# Altium PCB L506_M_V1.1.1.PcbDoc
Units mil, origin at the board's own origin, x right, y up, seen from the top; angles counter-clockwise.
Board outline 5890 x 4596 mil, 2 copper layers (Top Layer, Bottom Layer); 95 components, 63 nets, 327 pads, 101 vias.
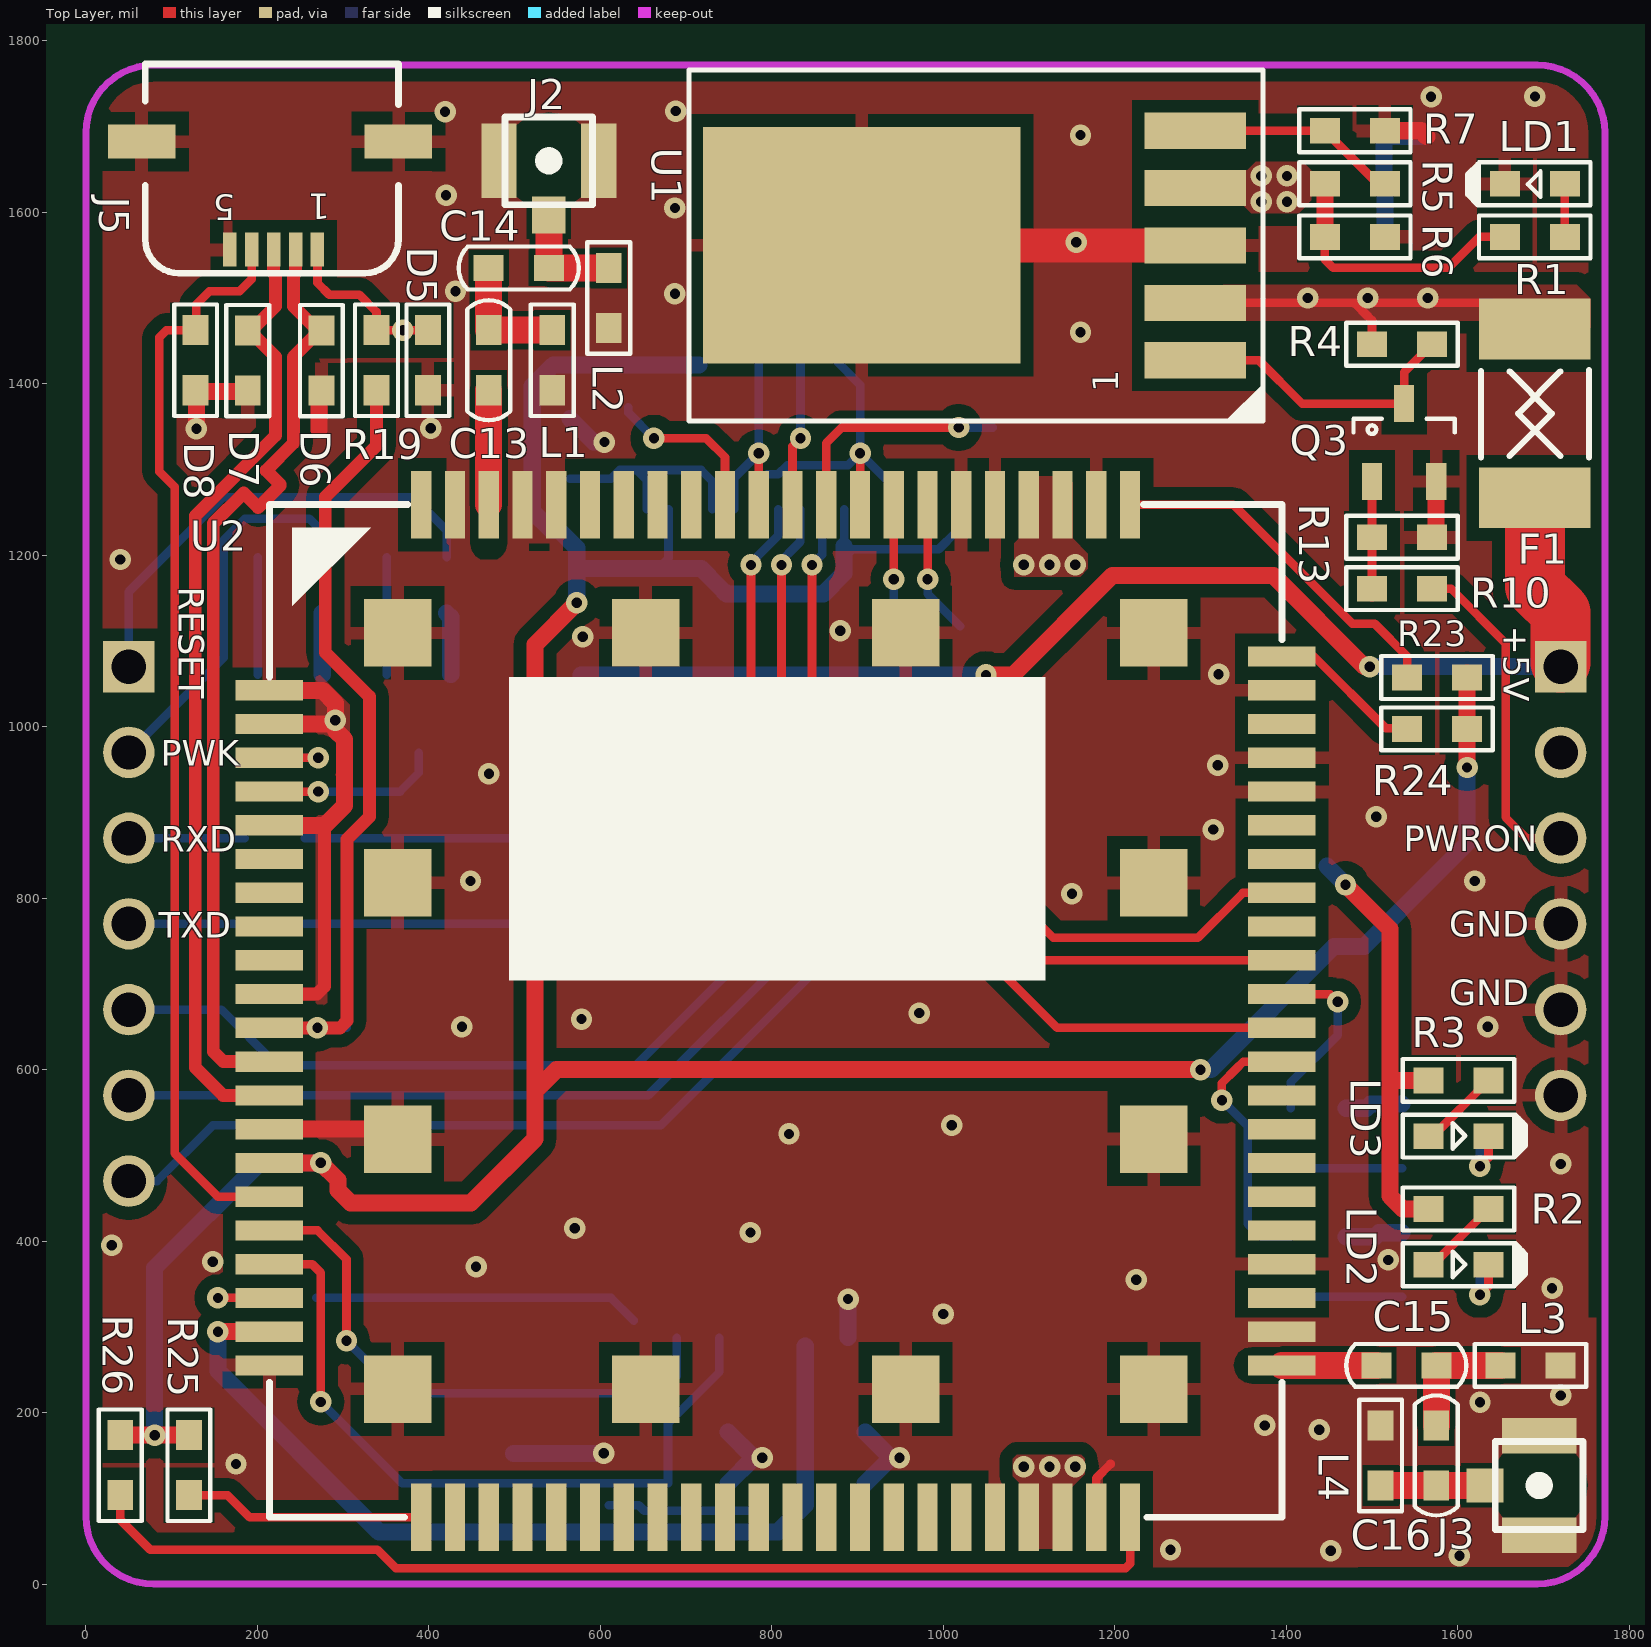
[diagram p0: Top Layer view]
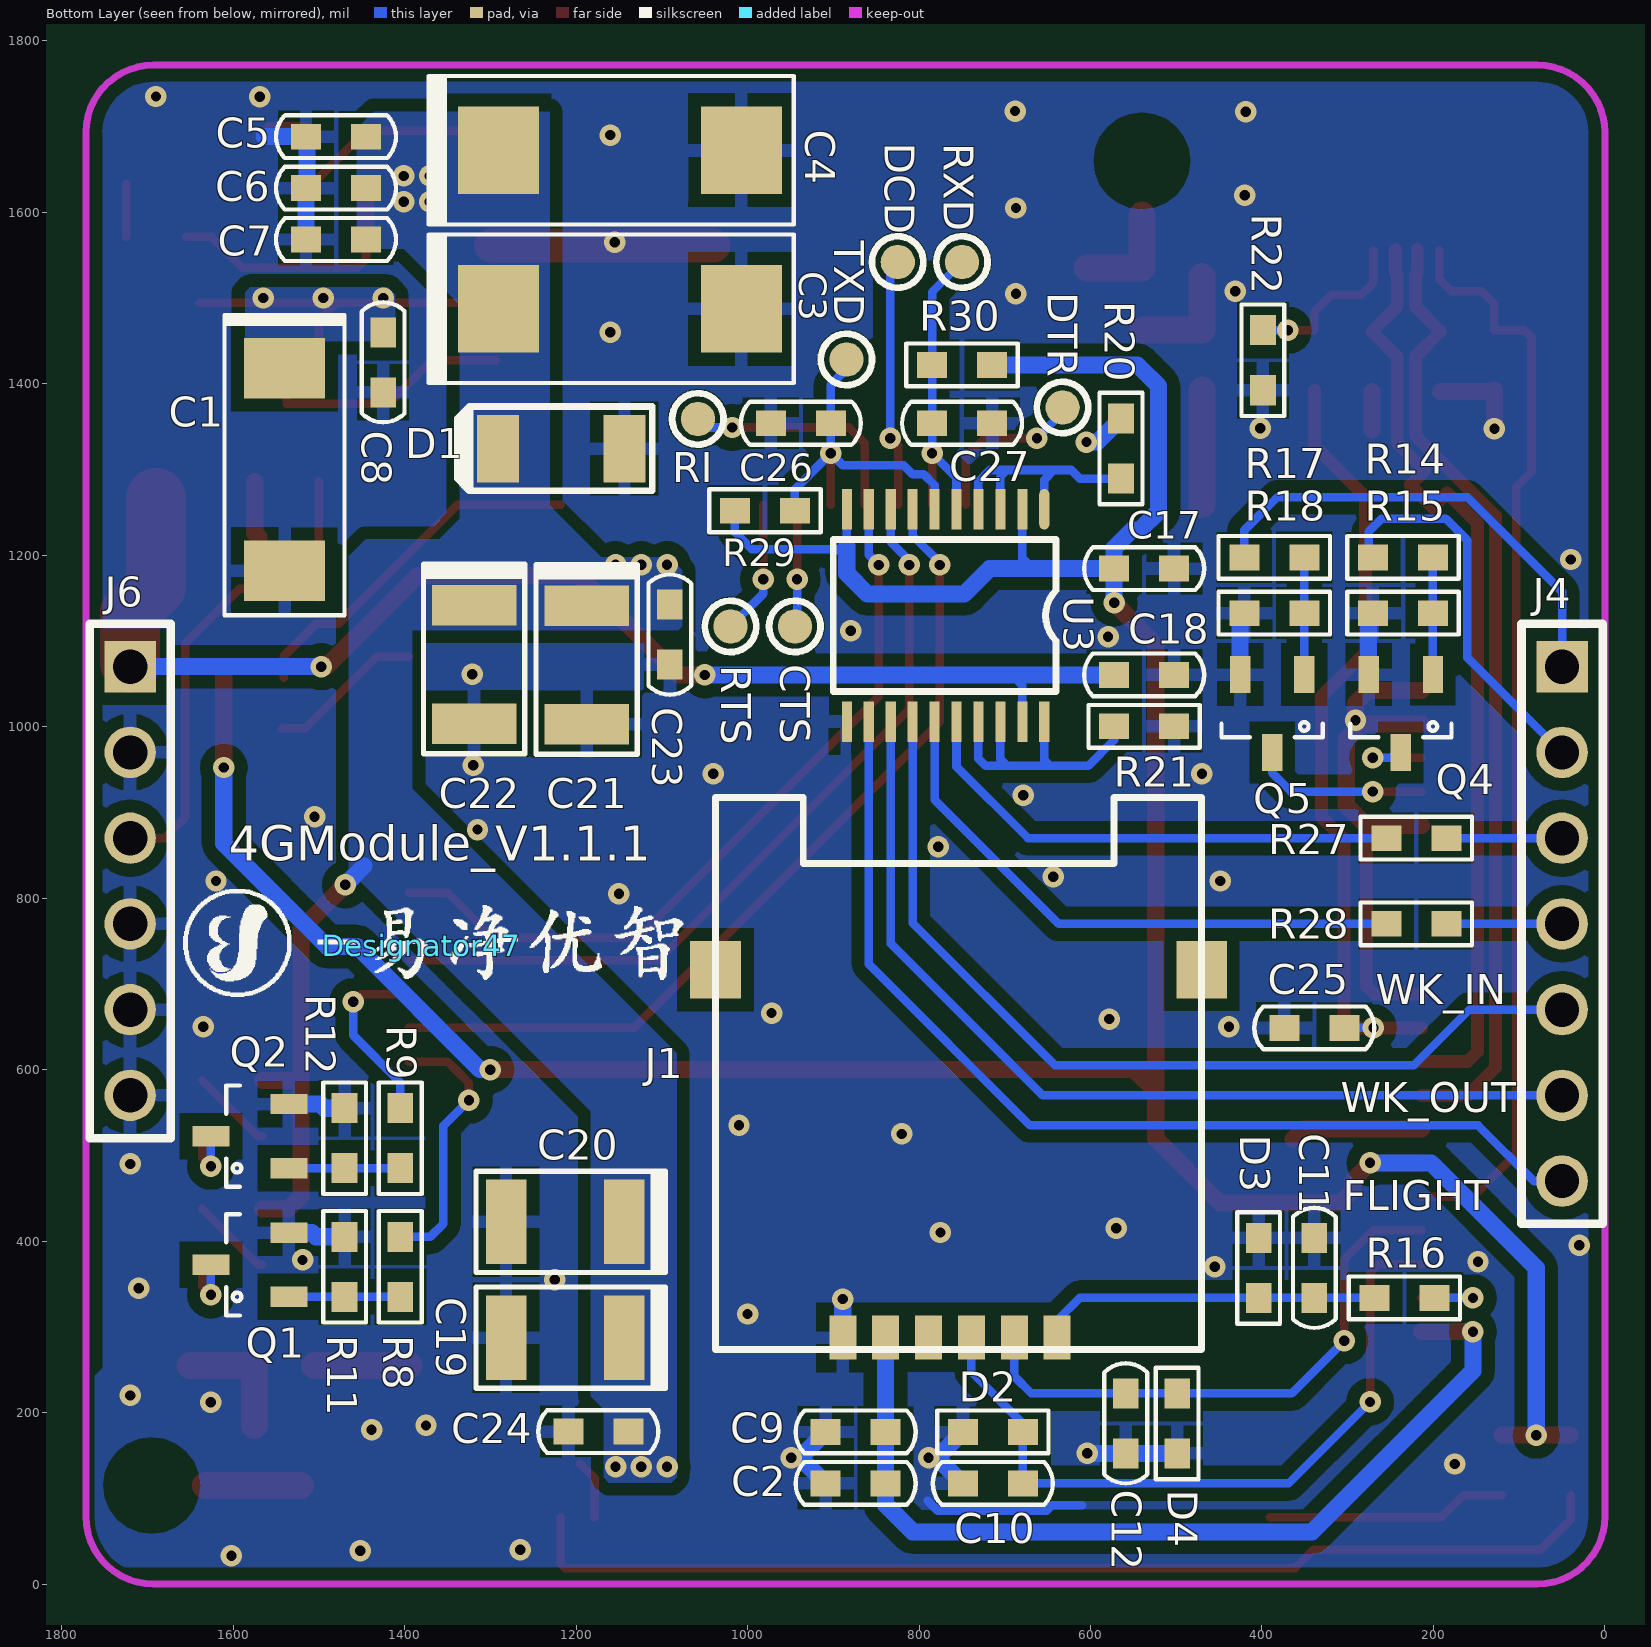
[diagram p1: Bottom Layer view, seen from below]

## Layer stack, top to bottom
Top Layer: signal copper 1.4
Dielectric: dielectric 12.6, FR-4, Dk 4.8
Bottom Layer: signal copper 1.4

## Board outline
-1744.1,2857.4 -1744.1,-1531.6 -1698.1,-1577.6 3891.9,-1577.6 3937.9,-1531.6 4145.9,-1323.6 4145.9,2672.4 3799.9,3018.4 -1490.1,3018.4

## Design rules (kind name [scope] priority, off if disabled: settings)
Clearance [All] p1: gap=6
ComponentClearance [All] p1: gap=5 collisioncheckmode=2 verticalgap=10
DiffPairsRouting DiffPair_DiffPairsRouting [InDifferentialPair ('NewDifferentialPair1')] p1: maxlimit=100 minlimit=6 mostfreqgap=6 maxuncoupledlength=500
DiffPairsRouting [All] p2: maxlimit=100 minlimit=6 mostfreqgap=6 maxuncoupledlength=500
MatchedLengths DiffPair_MatchedLengths [InDifferentialPair ('NewDifferentialPair1')] p1: tolerance=1000 checknetsindiffpair=TRUE checkdiffpairvsdiffpair=TRUE checkothers=TRUE
PlaneClearance [All] p1: clearance=5.91
PlaneConnect [All] p1: planeconnectstyle=Relief reliefexpansion=20 reliefentries=4 reliefconductorwidth=20 reliefairgap=10
PolygonConnect [All] p1: connectstyle=Relief reliefconductorwidth=15 reliefentries=4 polygonreliefangle="90 Angle"
RoutingCorners [All] p1: cornerstyle=Round minsetback=393.7 maxsetback=393.7
RoutingVias [All] p1: holewidth=28 width=50 viastyle="Through Hole" minholewidth=12 minwidth=25 maxholewidth=50 maxwidth=50
SolderMaskExpansion [All] p1: expansion=4
TestPointUsage [All] p1: valid=0 allowmultiple=FALSE
Testpoint [All] p1: side=15 testpointundercomponent=TRUE minsize=40 maxsize=100 preferedsize=60 minholesize=0 maxholesize=40 preferedholesize=32 testpointgrid=1 style=1021 order=0123456789
Width DiffPair_Width [InDifferentialPair('NewDifferentialPair1')] p1: maxlimit=15 minlimit=15 preferedwidth=15
Width [All] p2: maxlimit=200 minlimit=10 preferedwidth=15
14 further rules are at their usual default settings.

## Classes and differential pairs
differential pair NewDifferentialPair1: +4G_USB_P -4G_USB_N

## Components (designator, comment, footprint, x,y, rotation, side; value= is the part's Value field where it differs from the comment)
C1 "100uF/16V" C_TAN_C 1540,1300 r270 bottom
C2 "33PF" 0603_C 838.9,117.4 r0 bottom
C3 "220uF/10V" C_TAN_D 1148.9,1487.4 r180 bottom
C4 "220uF/10V" C_TAN_D 1148.9,1672.4 r180 bottom
C5 "0.1uF" 0603_C 1515,1688.19 r180 bottom
C6 "2.2μF" 0603_C 1515,1628.19 r180 bottom
C7 "33PF" 0603_C 1515,1568.19 r180 bottom
C8 "0.1uF" 0603_C 1425,1390 r90 bottom
C9 "1uF" 0603_C 838.9,177.4 r0 bottom
C10 "33PF" 0603_C 748.9,117.4 r180 bottom
C11 "33PF" 0603_C 338.9,403.74 r270 bottom
C12 "33PF" 0603_C 558.9,152.4 r90 bottom
C13 "27PF" 0603_C 469.8,1392.4 r90 top
C14 "27PF" 0603_C 469.8,1535 r0 top
C15 "27PF" 0603_C 1505,255 r0 top
C16 "27PF" 0603_C 1575,185 r270 top
C17 "0.1uF" 0603_C 502.41,1184.37 r0 bottom
C18 "0.1uF" 0603_C 502.41,1060.4 r0 bottom
C19 "47uF/10V" C_TAN_B 1143.9,287.4 r0 bottom
C20 "47uF/10V" C_TAN_B 1143.9,422.4 r0 bottom
C21 "47uF/10V" C_TAN_B 1187.64,1140.83 r270 bottom
C22 "47uF/10V" C_TAN_B 1318.9,1141.4 r270 bottom
C23 "1uF" 0603_C 1090.63,1072.4 r90 bottom
C24 "1uF" 0603_C 1209.09,177.83 r180 bottom
C25 "33PF" 0603_C 373.9,648.66 r180 bottom
C26 "1nF" 0603_C 972.87,1353.94 r180 bottom
C27 "1nF" 0603_C 714.76,1353.94 r0 bottom
CTS "Component_1" TP-40 944.76,1116.94 r0 bottom (schematic designator TP3)
D1 "BZV55C5V1" SOD-80 1217.41,1324.37 r0 bottom
D2 "EGA10603V05A1-B" 0603_R 748.9,177.4 r180 bottom
D3 "EGA10603V05A1-B" 0603_R 403.9,403.74 r270 bottom
D4 "EGA10603V05A1-B" 0603_R 498.9,152.4 r90 bottom
D5 "EGA10603V05A1-B" 0603_R 398.9,1392.4 r90 top
D6 "EGA10603V05A1-B" 0603_R 274.66,1391.91 r90 top
D7 "EGA10603V05A1-B" 0603_R 188.66,1391.91 r90 top
D8 "EGA10603V05A1-B" 0603_R 127.9,1392.4 r90 top
DCD "Component_1" TP-40 824.76,1541.94 r0 bottom (schematic designator TP5)
Designator47 "Comment" PIC_AIRFACTORY-1500 1380,745 r180 bottom
DTR "Component_1" TP-40 632.5,1372.28 r0 bottom (schematic designator TP4)
F1 "Fuse 2A" 1812_F 1690,1267 r90 top
J1 "SIM_Card" MicroSIM-6 888.9,287.4 r180 bottom
J2 "CON2" RF-Z 539.8,1660 r0 top
J3 "CON2" RF-Z 1695,115 r270 top
J4 "CON7" SIP7 50,1070 r270 bottom
J5 "USB" MICROUSB_SMD1 218.87,1662.94 r180 top
J6 "CON6" SIP6 1720,1070 r270 bottom
L1 "NC" 0603_R 543.9,1392.4 r90 top
L2 "NC" 0603_R 609.8,1465 r90 top
L3 "NC" 0603_R 1720,255 r180 top
L4 "NC" 0603_R 1510,185 r270 top
LD1 "WHITE" LED_0603 1724.88,1633.19 r180 top
LD2 "WHITE" LED_0603 1565.87,372.4 r0 top
LD3 "WHITE" LED_0603 1565.87,522.4 r0 top
Q1 "2N3904" SOT23 1535,335 r0 bottom
Q2 "2N3904" SOT23 1535,485 r0 bottom
Q3 "2N3904" SOT23 1500,1286 r90 top
Q4 "2N3904" SOT23 200.63,1060.67 r270 bottom
Q5 "2N3904" SOT23 350.63,1060.67 r270 bottom
R1 "1K" 0603_R 1654.88,1571.26 r0 top
R2 "1K" 0603_R 1565.87,437.4 r0 top
R3 "1K" 0603_R 1565.87,587.4 r0 top
R4 "47K" 0603_R 1500,1446 r0 top
R5 "100K" 0603_R 1515,1633.19 r180 top
R6 "750R" 0603_R 1515,1571.26 r180 top
R7 "47K" 0603_R 1445,1695 r0 top
R8 "4.7K" 0603_R 1405,405 r270 bottom
R9 "4.7K" 0603_R 1405,555 r270 bottom
R10 "4.7K" 0603_R 1570,1161 r180 top
R11 "47K" 0603_R 1470,335 r90 bottom
R12 "47K" 0603_R 1470,485 r90 bottom
R13 "47K" 0603_R 1500,1221 r0 top
R14 "4.7K" 0603_R 270.63,1197.4 r180 bottom
R15 "47K" 0603_R 200.63,1132.4 r0 bottom
R16 "22R" 0603_R 268.9,333.74 r180 bottom
R17 "4.7K" 0603_R 420.63,1197.4 r180 bottom
R18 "47K" 0603_R 350.63,1132.4 r0 bottom
R19 "0R" 0603_R 338.9,1392.4 r90 top
R20 "47K" 0603_R 564.41,1289.4 r90 bottom
R21 "47K" 0603_R 502.41,1000.4 r0 bottom
R22 "47K" 0603_R 398.9,1462.4 r270 bottom
R23 "NC" 0603_R 1610.87,1057.4 r180 top
R24 "NC" 0603_R 1610.87,997.4 r180 top
R25 "NC" 0603_R 120.08,173.66 r270 top
R26 "NC" 0603_R 40.08,173.66 r270 top
R27 "22R" 0603_R 185,870 r0 bottom
R28 "22R" 0603_R 185,770 r0 bottom
R29 "10K" 0603_R 944.76,1251.94 r0 bottom
R30 "10K" 0603_R 784.76,1421.94 r180 bottom
RI "Component_1" TP-40 1057.87,1358.94 r0 bottom (schematic designator TP2)
RTS "Component_1" TP-40 1019.76,1116.94 r0 bottom (schematic designator TP7)
RXD "Component_1" TP-40 749.76,1541.94 r0 bottom (schematic designator TP1)
TXD "Component_1" TP-40 884.5,1428.28 r0 bottom (schematic designator TP6)
U1 "MIC29302" TO-263-5 1293.9,1427.4 r90 top
U2 "L506" L506 213.9,1042.4 r0 top locked
U3 "TXB0108RWR" TSSP20 653.9,1253.66 r270 bottom

## Footprints (in the part's own frame and the unit in brackets; to place one, negate y for a bottom-side part, rotate by r counter-clockwise, add the part's x,y. Pads: shape width x height; smd on the part's side, far side on the other; paste and mask are expansions set on the pad)
0603_C [mil]
  rect 35x30 smd: 1(0,0) 2(70,0)
  silkscreen extent -35,-25 105,25, body extent 5,-15 65,15, height 39
0603_R [mil]
  rect 35x30 smd: 1(0,0) 2(70,0)
  silkscreen extent -30,-25 100,25, body extent 5,-15 65,15, height 39
1812_F [mm]
  rect 1.8x3.3 smd: 1(0,0) 2(5,0)
  silkscreen extent 1.2,-1.6 3.78,1.6
C_TAN_B [mm]
  rect 1.2x2.5 smd: 1(0,0) 2(3.5,0)
  silkscreen extent -1.22,-1.5 4.39,1.5, body extent 0,-1.5 3.5,1.5, height 2
C_TAN_C [mm]
  rect 1.8x2.4 smd: 1(-3,0) 2(3,0)
  silkscreen extent -4.57,-1.78 4.32,1.78, body extent -3,-1.78 3,1.78, height 2.6
C_TAN_D [mm]
  rect 2.4x2.6 smd: 1(-3.6,0) 2(3.6,0)
  silkscreen extent -5.67,-2.2 5.15,2.2, body extent -3.67,-2.2 3.53,2.2, height 4.3
L506 [mm]
  rect 2x0.6 smd: 1(0,0) 2(0,-1) 3(0,-2) 4(0,-3) 5(0,-4) 6(0,-5) 7(0,-6) 8(0,-7) 9(0,-8) 10(0,-9) 11(0,-10) 12(0,-11) 13(0,-12) 14(0,-13) 15(0,-14) 16(0,-15) 17(0,-16) 18(0,-17) 19(0,-18) 20(0,-19) 41(30,-19) 42(30,-18) 43(30,-17) 44(30,-16) 45(30,-15) 46(30,-14) 47(30,-13) 48(30,-12) 49(30,-11) 50(30,-10) 51(30,-9) 52(30,-8) 53(30,-7) 54(30,-6) 55(30,-5) 56(30,-4) 57(30,-3) 58(30,-2) 59(30,-1) 60(30,0) 81(0,-20) 82(30,-20) 85(30,1)
  rect 0.6x2 smd: 21(5.5,-24.5) 22(6.5,-24.5) 23(7.5,-24.5) 24(8.5,-24.5) 25(9.5,-24.5) 26(10.5,-24.5) 27(11.5,-24.5) 28(12.5,-24.5) 29(13.5,-24.5) 30(14.5,-24.5) 31(15.5,-24.5) 32(16.5,-24.5) 33(17.5,-24.5) 34(18.5,-24.5) 35(19.5,-24.5) 36(20.5,-24.5) 37(21.5,-24.5) 38(22.5,-24.5) 39(23.5,-24.5) 40(24.5,-24.5) 61(24.5,5.5) 62(23.5,5.5) 63(22.5,5.5) 64(21.5,5.5) 65(20.5,5.5) 66(19.5,5.5) 67(18.5,5.5) 68(17.5,5.5) 69(16.5,5.5) 70(15.5,5.5) 71(14.5,5.5) 72(13.5,5.5) 73(12.5,5.5) 74(11.5,5.5) 75(10.5,5.5) 76(9.5,5.5) 77(8.5,5.5) 78(7.5,5.5) 79(6.5,5.5) 80(5.5,5.5) 83(25.5,-24.5) 84(4.5,-24.5) 86(4.5,5.5) 87(25.5,5.5)
  rect 2x2 smd: 88(3.8,1.7) 89(3.8,-5.7) 90(3.8,-13.3) 91(3.8,-20.7) 92(11.15,-20.7) 93(18.85,-20.7) 94(26.2,-20.7) 95(26.2,-13.3) 96(26.2,-5.7) 97(26.2,1.7) 98(18.85,1.7) 99(11.15,1.7)
  silkscreen extent 0,-24.5 30,5.5, body extent 0,-24.49 30,5.49, height 2.8
LED_0603 [mil]
  rect 35x30 smd: A(0,0) K(70,0)
  silkscreen extent -30,-25 114,25
MicroSIM-6 [mm]
  rect 1.5x1.7 smd: 0(-3.77,10.9) 0(10.63,10.9)
  rect 0.8x1.3 smd: 1(1.27,0) 2(3.81,0) 3(6.35,0) 5(0,0) 6(2.54,0) 7(5.08,0)
  silkscreen extent -3.77,-0.35 10.63,16
MICROUSB_SMD1 [mm]
  rect 0.4x1 smd: 1(-1.299,2.705) 2(-0.649,2.705) 3(0.001,2.705) 4(0.651,2.705) 5(1.301,2.705)
  rect 2x1 smd: 6(-3.699,-0.495) 7(3.901,-0.495)
  silkscreen extent -3.7,-2.8 3.8,3.4
PIC_AIRFACTORY-1500 [mil]
  silkscreen extent -278,-60 305,65
RF-Z [mm]
  rect 1x1.1 smd: 1(0,-1.6)
  rect 1.05x2.2 smd: 2(-1.475,0) 2(1.475,0)
  silkscreen extent -1.3,-1.3 1.3,1.3
SIP6 [mil]
  rect 60x60 hole 40: 1(0,0)
  round 60 hole 40: 2(100,0) 3(200,0) 4(300,0) 5(400,0) 6(500,0)
  silkscreen extent -50,-47 550,47
SIP7 [mil]
  rect 60x60 hole 40: 1(0,0)
  round 60 hole 40: 2(100,0) 3(200,0) 4(300,0) 5(400,0) 6(500,0) 7(600,0)
  silkscreen extent -50,-47 650,47
SOD-80 [mm]
  rect 1.25x2 smd: 1(-1.875,0) 2(1.875,0)
  silkscreen extent -2.7,-1.25 3.08,1.25
SOT23 [mm]
  rect 1.092x0.6 smd: 1(0,0) 2(0,-1.9) 3(2.308,-0.95)
  silkscreen extent 1.41,-2.45 1.85,0.55, body extent 0.45,-2.45 1.85,0.55, height 1.1
TO-263-5 [mm]
  rect 1.07x3 smd: 1(0,0) 2(1.7,0) 3(3.4,0) 4(5.1,0) 5(6.8,0)
  rect 7x9.4 smd: 6(3.41,9.878)
  silkscreen extent -1.8,-2 8.6,15, body extent 0,0 6.8,12.6, height 4.5
TP-40 [mil]
  round 40 smd: 1(0,0)
  silkscreen extent -30,-30 30,30
TSSP20 [mm]
  oval 1.2x0.3 smd: 1(0,0)
  rect 1.2x0.3 smd: 2(0,-0.65) 3(0,-1.3) 4(0,-1.95) 5(0,-2.6) 6(0,-3.25) 7(0,-3.9) 8(0,-4.55) 9(0,-5.2) 10(0,-5.85) 11(6.3,-5.85) 12(6.3,-5.2) 13(6.3,-4.55) 14(6.3,-3.9) 15(6.3,-3.25) 16(6.3,-2.6) 17(6.3,-1.95) 18(6.3,-1.3) 19(6.3,-0.65) 20(6.3,0)
  silkscreen extent 0.9,-6.25 5.4,0.35

## Part data
C1 C3 C4 C19 C20 C21 C22: library part ECAP, "E-CAP"
C2 C9 C10 C11 C12 C13 C14 C15 C16 C25: library part CAP, "CAP"
C5 C6 C7 C8 C17 C18 C23 C24 C26 C27: library part "Cap Semi", "Capacitor"
D1: library part "DIODE SCHOTTKY"
D2 D3 D4 D5 D6 D7 D8: library part "DIODE TVS BI-DIR"
F1: library part "Fuse 1", "Fuse"
J4: library part CON8
J5: library part USB-M
J6: library part CON7
L1 L2 L3 L4: library part L
LD1 LD2 LD3: library part LED, "LED"
Q1 Q2 Q3 Q4 Q5: library part NPN
R1 R2 R3 R6 R8 R9 R10 R11 R12 R13 R14 R15 R17 R18 R19 R20 R21 R22 R23 R24 R25 R26 R27 R28 R29 R30: library part RES1
R4 R5 R7 R16: library part R0.25W, "RESISTOR"
U3: library part TXB0108RGYR

## Via types
v1: diameter 25, hole 12, Top Layer to Bottom Layer, tented both sides, 101 vias

## Nets (pads, with @x,y where several pads share a name; then routed paths per layer and width w, separated by ;. In a path a pad name is that pad's centre, name@x,y a point inside that pad or via, vN(x,y) a via of type N, cw(c..) or ccw(c..) an arc to the next point about the centre after c; other vN are vias at no path point)
4G_FLIGHTMODE: U2.54 U3.9 | length 909.8
  Top Layer w10: v1(846.85,1188.66) 846.85,1035.33 1128.52,753.66 1296.85,753.66 1349.37,806.18 U2.54
  Bottom Layer w10: v1(846.85,1188.66) 858.62,1200.43 U3.9
4G_MAIN_ANT: C15.1 U2.82 | length 110
  Top Layer w31.5: U2.82 C15.1
4G_NETLIGHT: R9.1 U2.51 | length 215.6
  Top Layer w10: U2.51 1451,688.07 v1(1460,679.07)
  Bottom Layer w10: R9.1 1405,585 1460,640 v1(1460,679.07)
4G_STATUS: R8.1 U2.49 | length 316.9
  Top Layer w10: v1(1325,564.33) 1325,584.33 1341.03,600.36 1350,609.33 U2.49
  Bottom Layer w10: v1(1325,564.33) 1355,534.33 1355,420 1370,405 R8.1 ; v1@1325,569.33 v1@1327.5,566.83
4G_UART_CTS: CTS.1 U2.67 | length 146.6
  Top Layer w10: v1(942.24,1171.94) U2.67
  Bottom Layer w10: v1@942.24,1169.46 v1@944.76,1166.94 ; v1(942.24,1171.94) 942.24,1119.46 CTS.1
4G_UART_DCD: DCD.1 U2.70 | length 290.4
  Top Layer w10: U2.70 824.13,1327.13 v1(833.41,1336.4)
  Bottom Layer w10: DCD.1 833.41,1533.29 v1(833.41,1336.4)
4G_UART_DTR: DTR.1 U2.72 | length 195.8
  Top Layer w10: v1(662.5,1336.28) 723.5,1336.28 745.39,1314.39 U2.72
  Bottom Layer w10: DTR.1 632.5,1366.28 v1(662.5,1336.28)
4G_UART_RI: RI.1 U2.69 | length 268.8
  Top Layer w10: U2.69 863.5,1330.83 881.61,1348.94 v1@1012.87,1348.94
  Bottom Layer w10: v1(1017.87,1348.94) RI.1@1057.87,1348.94
4G_UART_RTS: RTS.1 U2.66 | length 157.8
  Top Layer w10: v1(981.61,1171.94) U2.66
  Bottom Layer w10: v1(981.61,1171.94) 981.61,1155.09 RTS.1
4G_UART_RXD: C27.2 R30.1 RXD.1 U2.71 U3.5 | length 374.6
  Top Layer w10: U2.71 v1(784.76,1318.94)
  Bottom Layer w10: RXD.1 784.76,1506.94 v1(784.76,1318.94) 756.26,1290.43 U3.5
4G_UART_TXD: C26.2 R29.1 TXD.1 U2.68 U3.6 | length 430.4
  Top Layer w10: U2.68 v1(902.87,1318.94)
  Bottom Layer w10: U3.6 781.85,1281.84 794.41,1294.4 807.5,1294.4 818.09,1305 888.94,1305 v1(902.87,1318.94) ; TXD.1@873.5,1428.28 902.87,1398.91 v1(902.87,1318.94) ; R29.1 944.76,1277.05 v1(902.87,1318.94)
4G_USB_ID: D8.2 J5.4 U2.16 | length 1277.9
  Top Layer w10: J5.4@193.28,1555.91 193.28,1522.02 179.09,1507.83 144.09,1507.83 128.9,1492.64 128.9,1462.4 93.9,1462.4 85.63,1454.13 85.63,1297.4 103.5,1279.53 103.5,502.25 153.9,451.85 U2.16
4G_USB_N: D6.2 J5.2 U2.12 | length 1117.3
  Top Layer w15: U2.12 160.17,609.33 148.5,621 148.5,1237.15 183.98,1272.63 200.88,1255.72 226.59,1281.44 226.59,1282.44 210.19,1298.84 242.13,1330.78 242.13,1431.38 271.66,1460.91 242.13,1490.44 242.13,1526.68 244.43,1528.98 J5.2
4G_USB_P: D7.2 J5.3 U2.13 | length 1118
  Top Layer w15: U2.13 160.04,569.96 127.5,602.5 127.5,1245.85 221.13,1339.48 221.13,1431.45 191.66,1460.91 221.13,1490.38 221.13,1526.68 218.83,1528.98 J5.3
4G_USB_VBUS: C25.2 R19.1 U2.11 | length 920.4
  Top Layer w15: U2.11 296.2,648.7 304.51,657.01 304.51,868.78 317.66,881.92 330.73,895 330.73,1035 279.09,1086.64 279.09,1267.83 338.9,1327.64 R19.1
  Bottom Layer w10: v1(269.96,648.7) C25.2
4G_WAKEUP_IN: U2.50 U3.7 | length 1025.6
  Top Layer w10: v1(775.67,1188.66) 775.67,1005.84 1132.81,648.7 U2.50
  Bottom Layer w10: v1@775.67,1191.26 807.44,1223.03 U3.7
4G_WAKEUP_OUT: U2.52 U3.8 | length 942.1
  Top Layer w10: v1(811.26,1188.66) 811.26,1020.58 1104.4,727.44 U2.52
  Bottom Layer w10: v1@811.26,1193.85 826.12,1208.71 833.03,1215.62 U3.8
+3.8V: C3.1 C4.1 C5.2 C6.2 C7.2 C19.1 C20.1 C21.1 C22.1 C23.2 C24.2 D1.2 R1.1 R2.1 R3.1 R5.2 R6.2 U1.4 U2.38 U2.39 U2.62 U2.63 | length 813.8
  Top Layer w10: R6.2@1445,1561.26 1445,1545 1454.88,1535.12 1589,1535.12 1625.14,1571.26 R1.1
  Top Layer w20: R6.2 R5.2@1445,1628.19 ; v1(1469.08,815.66) 1520.87,763.87 1520.87,452.4 1535.87,437.4 R2.1 ; 1520.87,587.4 R3.1
  Bottom Layer w20: 1447.34,837.4 v1(1469.08,815.66)
  other v1: 1093.9,136.85 1123.9,136.85 1153.9,136.85 1093.9,1188.94 1123.9,1188.94 1153.9,1188.94 1370.87,1612.4 1400.87,1612.4 1370.87,1642.4 1400.87,1642.4
+5V: C18.2 F1.1 J6.1 U3.19 | length 1487.8
  Top Layer w20: v1(1049.76,1060.4) 1081.23,1060.4 1197.34,1176.52 1384.75,1176.52 1491.27,1070 v1(1497.27,1070)
  Top Layer w70: F1.1 1690,1163.27 1720,1133.27 J6.1@1720,1075
  Bottom Layer w10: U3.19 679.49,1048.02 683.87,1052.4
  Bottom Layer w20: C18.2@577.41,1060.4 v1(1049.76,1060.4) ; v1(1497.27,1070) J6.1
BOOT_CFG0: R24.2 U2.85 | length 184.3
  Top Layer w10: U2.85 1432.5,1081.77 1516,998.27 1540.87,998.27 1541.73,998.27 1542.6,997.4 R24.2
BOOT_CFG1: R23.2 U2.87 | length 421.1
  Top Layer w10: U2.87 1338.33,1258.94 1477.27,1120 1503.13,1120 1540.87,1082.26 R23.2
COEX1: R26.2 U2.83 | length 1286
  Top Layer w10: R26.2 40.08,74.92 75,40 340,40 361.34,18.66 1212.83,18.66 1217.83,23.66 U2.83
COEX2: R25.2 U2.84 | length 281.7
  Top Layer w10: R25.2 165.08,103.66 190.91,77.83 U2.84
FLIGHTMODE: J4.7 U3.12 | length 1195.9
  Bottom Layer w10: J4.7 83,470 148,535 670.4,535 858.62,723.22 U3.12
GND: C1.2 C2.2 C3.2 C4.2 C5.1 C6.1 C7.1 C8.1 C9.2 C10.1 C11.1 C12.1 C17.1 C18.1 C19.2 C20.2 C21.2 C22.2 C23.1 C24.1 C25.1 C26.1 C27.1 D1.1 D2.1 D3.1 D4.1 D5.1 D6.1 D7.1 D8.1 J1.5 J2.2 J3.2 J5.5 J5.6 J5.7 J6.2 J6.4 J6.5 J6.6 L1.1 L2.1 L3.1 L4.1 LD1.K Q1.2 Q2.2 Q3.2 Q4.2 Q5.2 R6.1 R7.2 R11.2 R12.2 R13.2 R15.2 R18.2 R20.2 R21.1 R22.2 U1.3 U1.6 U2.1 U2.2 U2.5 U2.10 U2.14 U2.37 U2.40 U2.41 U2.43 U2.57 U2.58 U2.60 U2.61 U2.64 U2.65 U2.77 U2.78 U2.80 U2.81 U2.88 U2.89 U2.90 U2.91 U2.92 U2.93 U2.94 U2.95 U2.96 U2.97 U2.98 U2.99 U3.11 | length 2411.6
  Top Layer w10: U2.40 1178.46,123.46 1195,140
  Top Layer w15: U2.10 269.17,688.07 278.09,697 278.09,885.36
  Top Layer w20: v1(128.9,1347.4) 128.9,1392.4 130.39,1390.91 D7.1@191.66,1390.91 ; U2.14 351.69,530.59 U2.90 ; U2.5 278.65,884.92 ; U2.2 286.5,1003.03 v1(290.87,1007.4) ; U2.1 275.87,1042.4 290.87,1027.4 290.87,995.87 301.73,985 301.73,908 286.1,892.37 279.09,885.36 ; 271.66,1345.91 D6.1@271.66,1390.91 ; R7.2 1557.09,1695 1563.9,1688.19 ; R13.2 1574.8,1225.8 Q3.2
  Top Layer w40: U1.6@1039.72,1561.26 U1.3 U1.3@1298.9,1561.26
  Bottom Layer w10: 609.76,91.94 644.76,91.94 651.3,85.4 778.23,85.4 789.76,96.94
  Bottom Layer w20: Q4.2 275.63,1060.87 R15.2@275.63,1132.4 ; R18.2 425.43,1127.6 Q5.2 ; D4.1 C12.1 v1(603.9,152.4) ; R20.2 591.87,1331.94 v1(604.76,1331.94) ; C10.1 v1@778.9,147.4 ; D2.1 v1@778.9,147.4 ; v1(788.9,147.4) v1@778.9,147.4 ; J1.5 v1(888.9,332.4) ; C2.2 v1@938.9,147.4 ; C9.2 v1@938.9,147.4 ; v1(948.9,147.4) v1@938.9,147.4 ; R11.2 1503.46,405 1508.27,409.8 Q1.2 ; R12.2 1493.46,555 1498.27,559.8 Q2.2 ; C6.1@1513.9,1637.6 C5.1@1513.9,1688.19 ; C7.1 C6.1 ; C5.1 1563.9,1688.19
  other v1: 1602,33 1451.76,38.94 1265,40 175,140 1438.5,180 1375,185 1626,212 1720,220 1000,315 1710,345 1225,355 455,370 148,376 1519,378 30,395 775,410 570,415 1720,490 820,525 1010,535 438.5,650 1635,650 578,659 972,666 1150,805 448.5,820 1620,820 643.5,825 777.5,860 1315,880 1505,895 678.5,920 470,945 1040,945 1320,955 1321,1061 579.5,1105 879.76,1111.94 40,1195 402,1348 1160,1460 687,1505 431,1508 1155,1565 687,1605 420.01,1620 1160,1690 418.87,1717.12 688,1718 1568.9,1734.84 1690,1735
GPS_ANT: C13.1 U2.79 | length 133.5
  Top Layer w31.5: U2.79 C13.1
NetC1_1: C1.1 C8.2 F1.2 R4.1 U1.2 | length 402.4
  Top Layer w10: U1.2 1425,1494.33 1479.41,1494.33 ; R4.1 1500,1473.74 1491.57,1482.17 1484.37,1489.37 1479.41,1494.33 ; F1.2@1639.41,1494.33 1565,1494.33 1495,1494.33 1479.41,1494.33
  other v1: 1425,1500 1495,1500 1565,1500
NetC13_2: C13.2 C14.1 L1.2 | length 131.7
  Top Layer w31.5: C14.1@469.8,1525 C13.2 L1.2@538.9,1462.4
NetC14_2: C14.2 J2.1 L2.2 | length 126
  Top Layer w31.5: J2.1 C14.2 L2.2@603.8,1535
NetC15_2: C15.2 C16.1 L3.2 | length 145
  Top Layer w31.5: C16.1 C15.2 L3.2
NetC16_2: C16.2 J3.1 L4.2 | length 110.4
  Top Layer w31.5: L4.2@1521.65,115 C16.2 J3.1
NetD5_2: D5.2 J5.1 R19.2 R22.1 | length 232.5
  Top Layer w10: J5.1@270.05,1555.91 270.05,1517.55 283.9,1503.7 318.9,1503.7 338.9,1483.7 R19.2 v1(369.72,1462.4) D5.2
  Bottom Layer w10: v1(369.72,1462.4) R22.1 R22.1@398.36,1462.94
NetLD1_A: LD1.A R1.2 | length 61.9
  Top Layer w10: R1.2 LD1.A
NetLD2_A: LD2.A R2.2 | length 96.9
  Top Layer w10: LD2.A 1570.87,372.4 R2.2
NetLD2_K: LD2.K Q1.3 | length 77.7
  Top Layer w10: v1@1625.87,332.4 v1@1628.37,334.9 ; v1(1625.87,337.4) 1635.87,347.4 LD2.K
  Bottom Layer w10: v1(1625.87,337.4) Q1.3
NetLD3_A: LD3.A R3.2 | length 96.9
  Top Layer w10: LD3.A 1570.87,522.4 R3.2
NetLD3_K: LD3.K Q2.3 | length 74.1
  Top Layer w10: v1(1625.87,487.4) 1635.87,497.4 LD3.K
  Bottom Layer w10: v1(1625.87,487.4) Q2.3
NetQ1_1: Q1.1 R8.2 R11.1 | length 130
  Bottom Layer w10: R8.2 R11.1 Q1.1
NetQ2_1: Q2.1 R9.2 R12.1 | length 130
  Bottom Layer w10: R9.2 R12.1 Q2.1
NetQ3_1: Q3.1 R10.2 R13.1 | length 130
  Top Layer w10: R10.2@1500,1151 R10.2 R13.1@1500,1216 ; R13.1 Q3.1
NetQ3_3: Q3.3 R4.2 U1.1 | length 347.1
  Top Layer w10: U1.1 1367.87,1427.4 1418.4,1376.87 Q3.3 1537.4,1413.4 R4.2
NetQ4_1: Q4.1 R14.2 R15.1 | length 136.7
  Bottom Layer w10: Q4.1 R14.2
NetQ4_3: Q4.3 U2.3 | length 93.4
  Top Layer w10: U2.3 v1@273.9,963.66
  Bottom Layer w10: Q4.3@243.03,969.8 249.17,963.66 v1@273.9,963.66
  other v1: 270.9,963.66
NetQ5_1: Q5.1 R17.2 R18.1 | length 136.7
  Bottom Layer w10: Q5.1 R17.2
NetQ5_3: Q5.3 U2.4 | length 206.9
  Top Layer w10: U2.4 v1@273.9,924.29
  Bottom Layer w10: v1@273.9,924.29 366.3,924.29 388.03,946.02 Q5.3
  other v1: 270.9,924.29
NetR5_1: R5.1 R7.1 U1.5 | length 248.8
  Top Layer w10: U1.5 1444.88,1695.12 R7.1 1510.91,1629.09 1511.81,1628.19 R5.1@1515,1628.19
NetR16_2: R16.2 U2.19 | length 105
  Top Layer w10: v1(153.9,333.74) U2.19
  Bottom Layer w10: v1(153.9,333.74) R16.2
NetR20_1: R20.1 U3.1 U3.3 U3.4 | length 307.7
  Bottom Layer w10: R20.1 612.44,1289.4 622.41,1299.37 717.41,1299.37 730.67,1286.11 U3.4 ; 642.41,1299.37 653.9,1287.88 U3.1 ; 697.41,1299.37 705.08,1291.7 U3.3
NetR21_2: R21.2 U3.17 U3.18 U3.20 | length 341.5
  Bottom Layer w10: R21.2 572.41,984.37 602.41,954.37 722.41,954.37 730.67,962.63 U3.17 ; 647.41,954.37 653.9,960.86 U3.20 ; 697.41,954.37 705.08,962.04 U3.18
NetR27_2: R27.2 U3.16 | length 588.1
  Bottom Layer w10: R27.2 673.04,870 756.26,953.22 U3.16
NetR28_2: R28.2 U3.15 | length 677.6
  Bottom Layer w10: R28.2 637.01,770 781.85,914.84 U3.15
PWRKEY: J4.2 R14.1 | length 454.9
  Bottom Layer w10: J4.2 160.63,1080.63 160.63,1217.54 185.5,1242.4 260.63,1242.4 275.63,1227.4 R14.1@275.63,1197.4
PWRON: J6.3 R10.1 | length 389.6
  Top Layer w10: R10.1 1592.27,1161 1655.87,1097.4 1655.87,894.13 1680,870 J6.3
RESET: J4.1 R17.1 | length 551.2
  Bottom Layer w10: J4.1 50,1157.4 160,1267.4 382.41,1267.4 420.63,1229.18 R17.1
SIM_CLK: C11.2 D3.2 J1.3 R16.1 | length 380.9
  Bottom Layer w10: R16.1 C11.2 D3.2 612.56,333.74 J1.3@638.9,307.4
SIM_DATA: C12.2 D4.2 J1.7 U2.17 | length 662.7
  Top Layer w10: U2.17 270.16,412.48 303.9,378.74 v1(303.9,283.74)
  Bottom Layer w10: v1(303.9,283.74) 365.24,222.4 D4.2 C12.2 668.9,222.4 688.9,242.4 J1.7
SIM_RST: C10.2 D2.2 J1.2 U2.18 | length 854.1
  Top Layer w10: U2.18 263.9,373.11 273.9,363.11 v1(273.9,212.4)
  Bottom Layer w10: v1(273.9,212.4) 368.9,117.4 C10.2 D2.2 678.9,187.4 738.9,247.4 J1.2
SIM_VDD: C2.1 C9.1 J1.1 U2.20 | length 1066.5
  Top Layer w20: v1(153.9,294.37) U2.20
  Bottom Layer w20: v1(153.9,294.37) 153.9,248.68 341.66,60.91 807.41,60.91 838.9,92.4 C2.1 C9.1 J1.1@838.9,277.4
UART_RXD: J4.3 R27.1 | length 135
  Bottom Layer w10: J4.3 R27.1
UART_TXD: J4.4 R28.1 | length 135
  Bottom Layer w10: J4.4 R28.1
VDD1V8: C17.2 R23.1 R24.1 R25.1 R26.1 R29.2 R30.2 U2.15 U3.2 U3.10 | length 4072.7
  Top Layer w20: R26.1 R25.1 ; U2.15 v1(273.9,491.22) 293.9,471.22 293.9,459.37 308.9,444.37 448.9,444.37 523.9,519.37 523.9,1095.89 v1(572.41,1144.4) ; 523.9,575 548.9,600 v1(1300,600) ; v1(1610.87,952.4) R24.1 R23.1 R23.1@1610.87,1062.4
  Bottom Layer w10: 667.41,1184.37 679.49,1196.45 U3.2 ; 884.21,1196.94 894.21,1206.94 994.76,1206.94 1014.76,1226.94 R29.2 ; 884.21,1210.71 U3.10
  Bottom Layer w20: v1(80.08,173.66) 80.08,368.66 202.64,491.22 v1(273.9,491.22) ; v1(572.41,1144.4) 572.41,1208.37 551.5,1229.28 542.5,1229.28 520.5,1251.28 520.5,1397.28 545.16,1421.94 R30.2 ; C17.2 717.63,1184.37 737.81,1164.19 747.41,1154.59 860,1154.59 884.21,1178.8 884.21,1210.71 ; v1(1300,600) 1312.01,600 1455.63,743.62 1490.63,743.62 1610.87,863.86 v1(1610.87,952.4)
WAKEUP_IN: J4.5 U3.14 | length 1086.3
  Bottom Layer w10: J4.5 158,670 222,606 ; 223,605 641.41,605 807.44,771.03 U3.14
WAKEUP_OUT: J4.6 U3.13 | length 1114.9
  Bottom Layer w10: J4.6 655.91,570 833.03,747.12 U3.13
pads on no net: J1.0 J1.6 U2.6 U2.7 U2.8 U2.9 U2.21 U2.22 U2.23 U2.24 U2.25 U2.26 U2.27 U2.28 U2.29 U2.30 U2.31 U2.32 U2.33 U2.34 U2.35 U2.36 U2.42 U2.44 U2.45 U2.46 U2.47 U2.48 U2.53 U2.55 U2.56 U2.59 U2.73 U2.74 U2.75 U2.76 U2.86

## Polygon pours and split planes (outlines as drawn)
+3.8V on Top Layer "Top Layer-No Net 5" (solid, remove dead copper, pour order 1001): 1082.72,1174.94 1159.72,1174.94 1168.72,1183.94 1168.72,1201.94 1150.72,1219.94 1150.72,1284.94 1143.72,1291.94 1100.72,1291.94 1093.72,1284.94 1089.72,1280.94 1089.72,1220.94 1082.72,1213.94 1082.72,1174.94
+3.8V on Top Layer "Top Layer-No Net" (solid, remove dead copper, pour order 1000): 1085.72,150.94 1160.72,150.94 1164.72,146.94 1164.72,127.94 1156.72,119.94 1146.72,109.94 1146.72,40.94 1092.72,40.94 1091.72,41.94 1088.72,44.94 1088.72,113.94 1088.72,117.94 1080.72,125.94 1080.72,145.94 1085.72,150.94
+3.8V on Top Layer "Top Layer-No Net 2" (solid, remove dead copper, pour order 1000): 1344.39,1648.94 1354.39,1648.94 1364.39,1658.94 1409.39,1658.94 1419.39,1658.94 1429.39,1648.94 1429.39,1613.94 1414.39,1598.94 1359.39,1598.94 1349.39,1608.94 1334.39,1608.94
GND on Top Layer "Top Layer-No Net 3" (solid, remove dead copper, pour order 1001): 1382.03,310.44 1767.03,310.44 1767.03,20.44 1482.03,20.44 1337.03,165.44 1317.03,185.44 1317.03,290.44 1317.03,295.44 1332.03,310.44
NetC1_1 on Top Layer "Top Layer-No Net 1" (solid, remove dead copper, pour order 1003): 1321.87,1515.4 1738.87,1515.4 1754.87,1499.4 1754.87,1465.4 1684.87,1465.4 1676.87,1473.4 1342.87,1473.4
GND on Top Layer "Top Layer-No Net 4" (solid, remove dead copper, pour order 1000): 447.72,1743.94 637.72,1743.94 647.72,1733.94 647.72,1422.94 651.72,1418.94 558.72,1325.94 558.72,1269.94 558.72,1218.94 553.72,1213.94 518.72,1213.94 510.72,1213.94 497.72,1200.94 496.72,1199.94 496.72,1191.94 487.72,1182.94 484.72,1182.94 451.72,1182.94 440.72,1193.94 420.72,1213.94 420.72,1241.94 420.72,1317.94 436.72,1333.94 435.72,1334.94 435.72,1386.94 435.72,1731.94 447.72,1743.94
GND on Top Layer "Top Layer-No Net 6" (solid, remove dead copper, pour order 1000): -74.26,1832.78 -74.26,21.78 5.74,-58.22 1450.74,-58.22 1485.74,-23.22 1484.74,-22.22 1455.74,-22.22 1455.74,-8.22 1495.74,31.78 1327.74,199.78 1327.74,265.78 1327.74,274.78 1354.74,301.78 1355.74,300.78 1739.74,300.78 1750.74,300.78 1785.74,335.78 1858.74,408.78 1858.74,1258.78 1858.74,1812.78 1792.74,1878.78 766.74,1878.78 629.74,1741.78 638.74,1732.78 638.74,1501.78 638.74,1434.78 535.74,1331.78 508.74,1304.78 508.74,1227.78 508.74,1222.78 502.74,1216.78 480.68,1194.72 444.97,1194.72 444.97,1204.56 439.74,1209.78 434.74,1214.78 434.74,1320.78 441.74,1327.78 443.74,1329.78 443.74,1347.78 443.74,1829.78 426.74,1846.78
GND on Top Layer "Top Layer-No Net 7" (solid, remove dead copper, pour order 1001): 281.5,1809 296.5,1794 296.5,1622 419.5,1622 430.5,1633 449.5,1652 449.5,1706 486.5,1706 505.5,1725 511.5,1731 668.5,1731 668.5,1823 655.5,1836
+3.8V on Bottom Layer "Bottom Layer-No Net 2" (solid, remove dead copper, pour order 1001): 1082.76,124.37 1088.73,118.4 1100.9,118.4 1161.8,118.4 1167.76,124.37 1167.76,203.97 1182.76,218.97 1182.76,226.72 1182.76,547.53 1169.9,560.4 1082.76,473.27 1082.76,124.37
+3.8V on Bottom Layer "Bottom Layer-No Net 4" (solid, remove dead copper, pour order 1000): 1345.08,1218.66 1445.08,1218.66 1465.08,1198.66 1464.9,1198.48 1464.9,833.4 1182.76,551.27 1182.76,448.68 1102.76,448.68 1082.76,468.68 1082.76,619.27 1130.9,667.4 1390.87,927.37 1390.87,1112.4 1345.08,1158.19
GND on Bottom Layer "Bottom Layer-No Net 6" (solid, remove dead copper, pour order 1001): 455,1740 645,1740 675,1710 675,1620 630,1575 430,1575
GND on Bottom Layer "Bottom Layer-No Net 5" (solid, remove dead copper, pour order 1000): 1520.07,269.36 1735.07,269.36 1770.07,234.36 1775.07,229.36 1775.07,19.36 1490.07,19.36 1420.07,89.36
NetC1_1 on Bottom Layer "Bottom Layer-No Net 3" (solid, remove dead copper, pour order 1003): 1411.08,1486.66 1411.08,1503.66 1419.08,1511.66 1420.08,1512.66 1580.08,1512.66 1586.08,1506.66 1586.08,1449.66 1413.08,1449.66 1411.08,1451.66
+3.8V on Bottom Layer "Bottom Layer-No Net 1" (solid, remove dead copper, pour order 1001): 1230.87,1717.4 1230.87,1257.4 1170.87,1197.4 1090.87,1197.4 1075.87,1182.4 1075.87,1117.4 1080.87,1112.4 1205.87,1112.4 1390.87,1112.4 1395.87,1117.4 1395.87,1182.4 1335.87,1242.4 1335.87,1492.4 1370.87,1527.4 1400.87,1557.4 1455.87,1557.4 1455.87,1697.4 1435.87,1717.4
GND on Bottom Layer "Bottom Layer-No Net" (solid, remove dead copper, pour order 1002): -62.85,1828.33 -62.85,20.33 25.15,-67.67 72.15,-20.67 1461.15,-20.67 1465.15,-16.67 1465.15,-10.67 1465.15,-7.88 1494.73,21.69 1566.15,93.12 1566.15,212.33 1733.14,212.33 1766.11,245.3 1805.15,284.35 1805.15,402.33 1805.15,1895.33 1748.15,1952.33 776.15,1952.33 689.15,1865.33 636.15,1812.33 636.15,1723.33 636.15,1627.33 592.15,1583.33 583.15,1592.33 466.15,1592.33 466.15,1827.33 481.15,1842.33
GND on Bottom Layer "Bottom Layer-No Net 7" (solid, remove dead copper, pour order 1003): 420.5,1847 1004.5,1847 1115.5,1736 1108.5,1729 1108.5,1613 764.5,1613 693.5,1684 656.5,1721 415.5,1721

## Keep-outs
Keep-Out Layer:
  lines w8: 0,78.74 ccw(c78.74,78.74) 78.74,0 1692.91,0 ccw(c1692.91,78.74) 1771.65,78.74 1771.65,1692.91 ccw(c1692.91,1692.91) 1692.91,1771.65 78.74,1771.65 ccw(c78.74,1692.91) 0,1692.91 0,78.74

## Silkscreen, mask and mechanical layers (free items; w line width, h text height)
Top Overlay:
  text "RESET" at 108,1163 h30 r270
  text "+5V" at 1653.76,1117.94 h30 r270
  text "PWK" at 87.41,954.37 h30
  text "PWRON" at 1537.27,855 h30
  text "RXD" at 87.41,854.37 h30
  text "GND" at 1590,755 h30
  text "TXD" at 85,754 h30
  text "GND" at 1590,675 h30
Bottom Overlay:
  text "4GModule_V1.1.1" at 1605,830 h70
  text "WK_IN" at 267.41,676.4 h35
  text "WK_OUT" at 308,550 h35
  text "FLIGHT" at 305.9,436.24 h35
Mechanical 1:
  lines w8: 0,78.74 ccw(c78.74,78.74) 78.74,0 1692.91,0 ccw(c1692.91,78.74) 1771.65,78.74 1771.65,1692.91 ccw(c1692.91,1692.91) 1692.91,1771.65 78.74,1771.65 ccw(c78.74,1692.91) 0,1692.91 0,78.74

## Text inside footprints (layer, text, board x,y; h text height)
J5: Top Overlay "5" at 173.85,1620.65 h30 r180; Top Overlay "1" at 284.85,1621.65 h30 r180
U1: Top Overlay "1" at 1204.17,1389.92 h30 r90